# Altium PCB ART_2024-06-07.pcbdoc
Units mil, origin at the board's own origin, x right, y up, seen from the top; angles counter-clockwise.
Board outline 4947 x 4947 mil, 2 copper layers (Top Layer, Bottom Layer); 7 components, 0 nets, 0 pads, 0 vias.
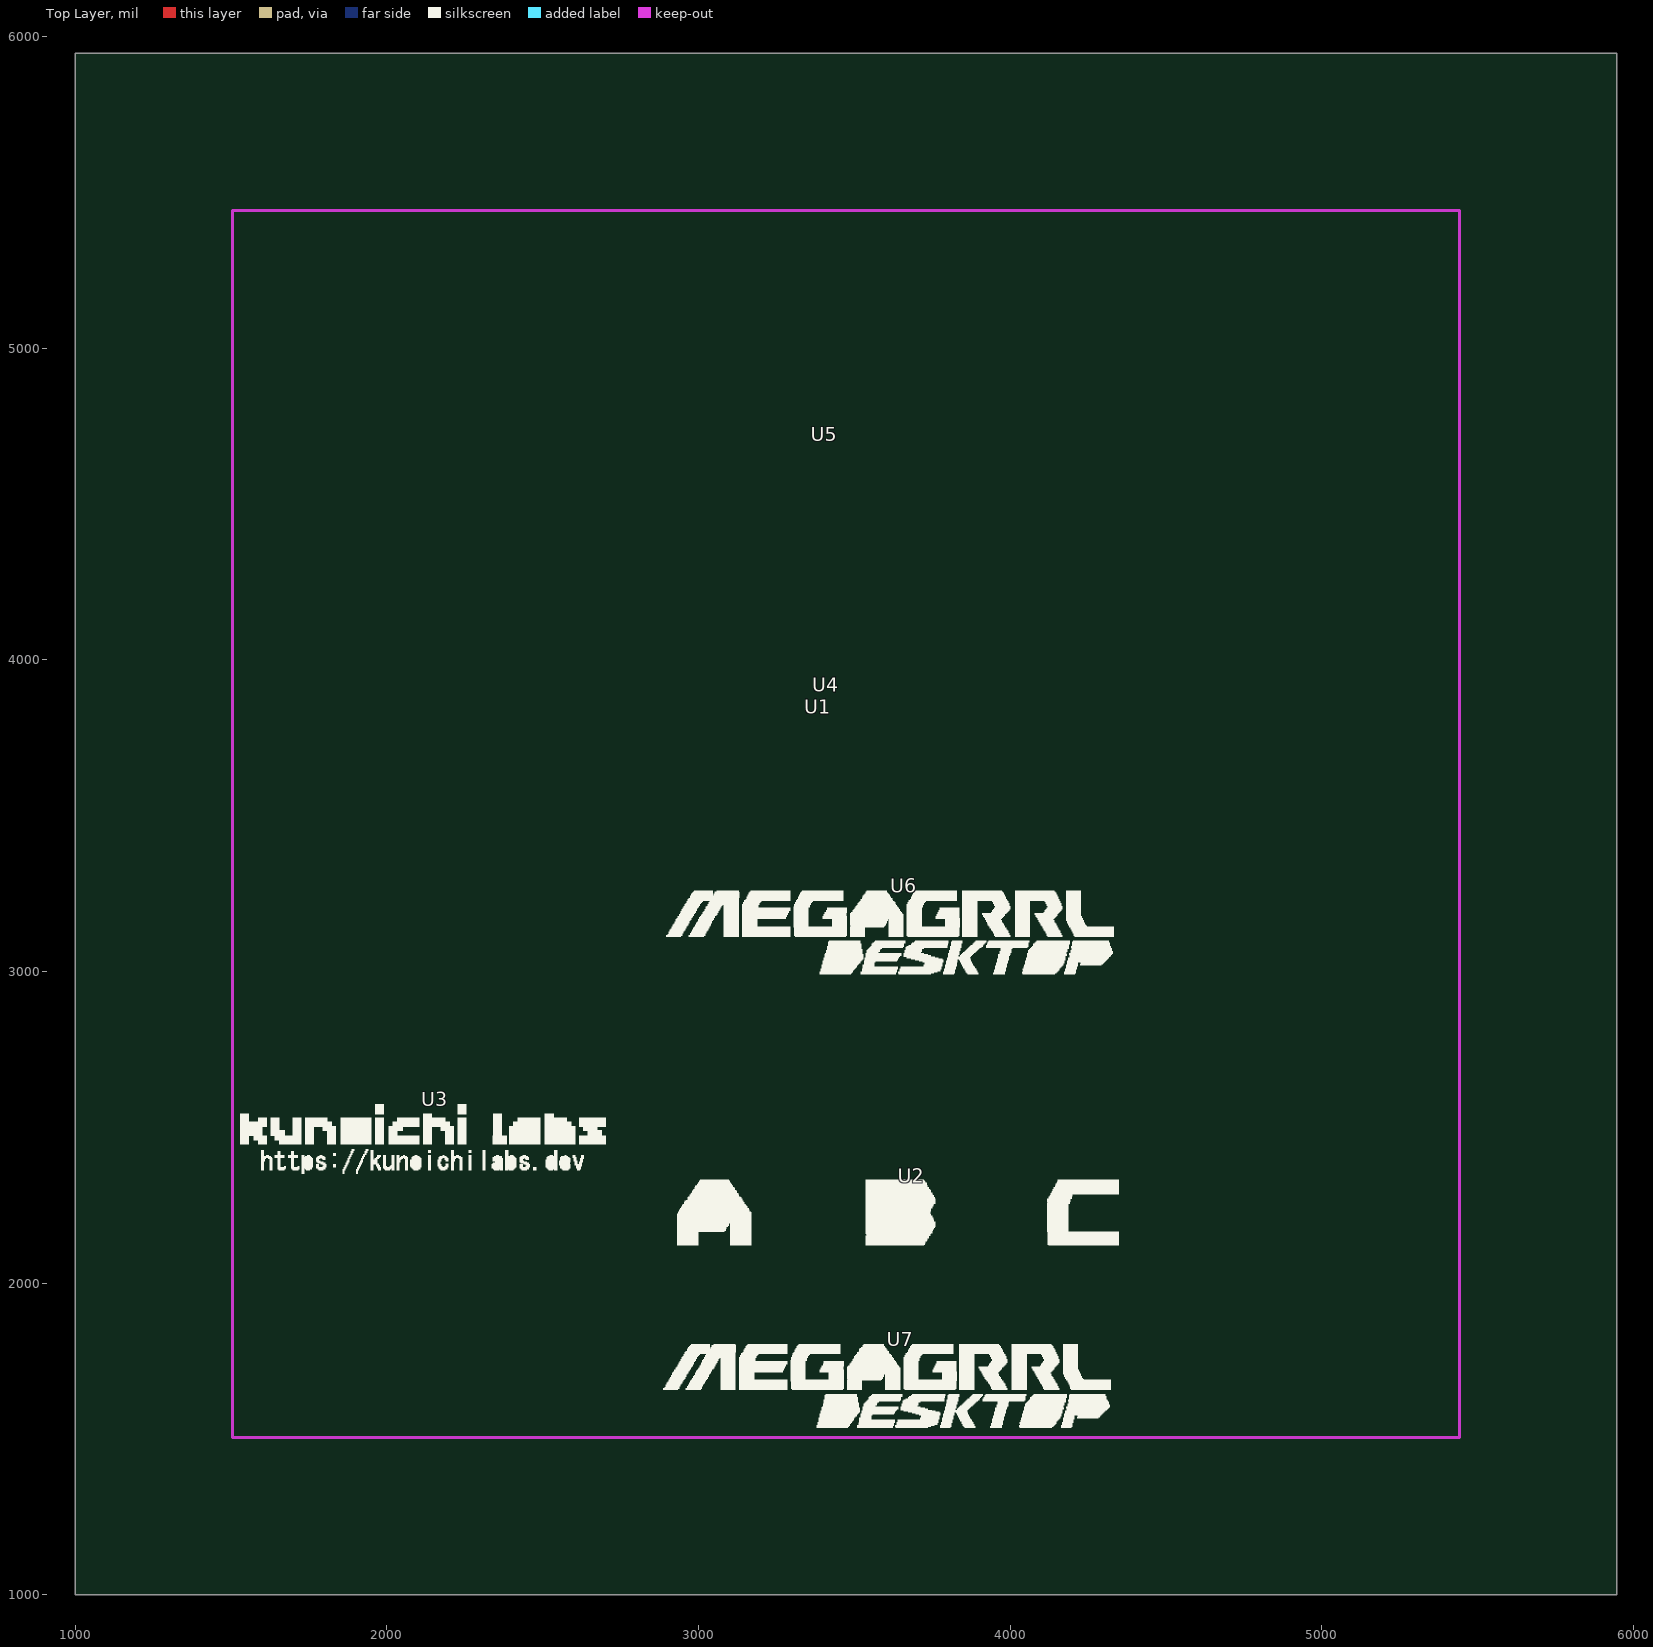
[diagram p0: Top Layer view]
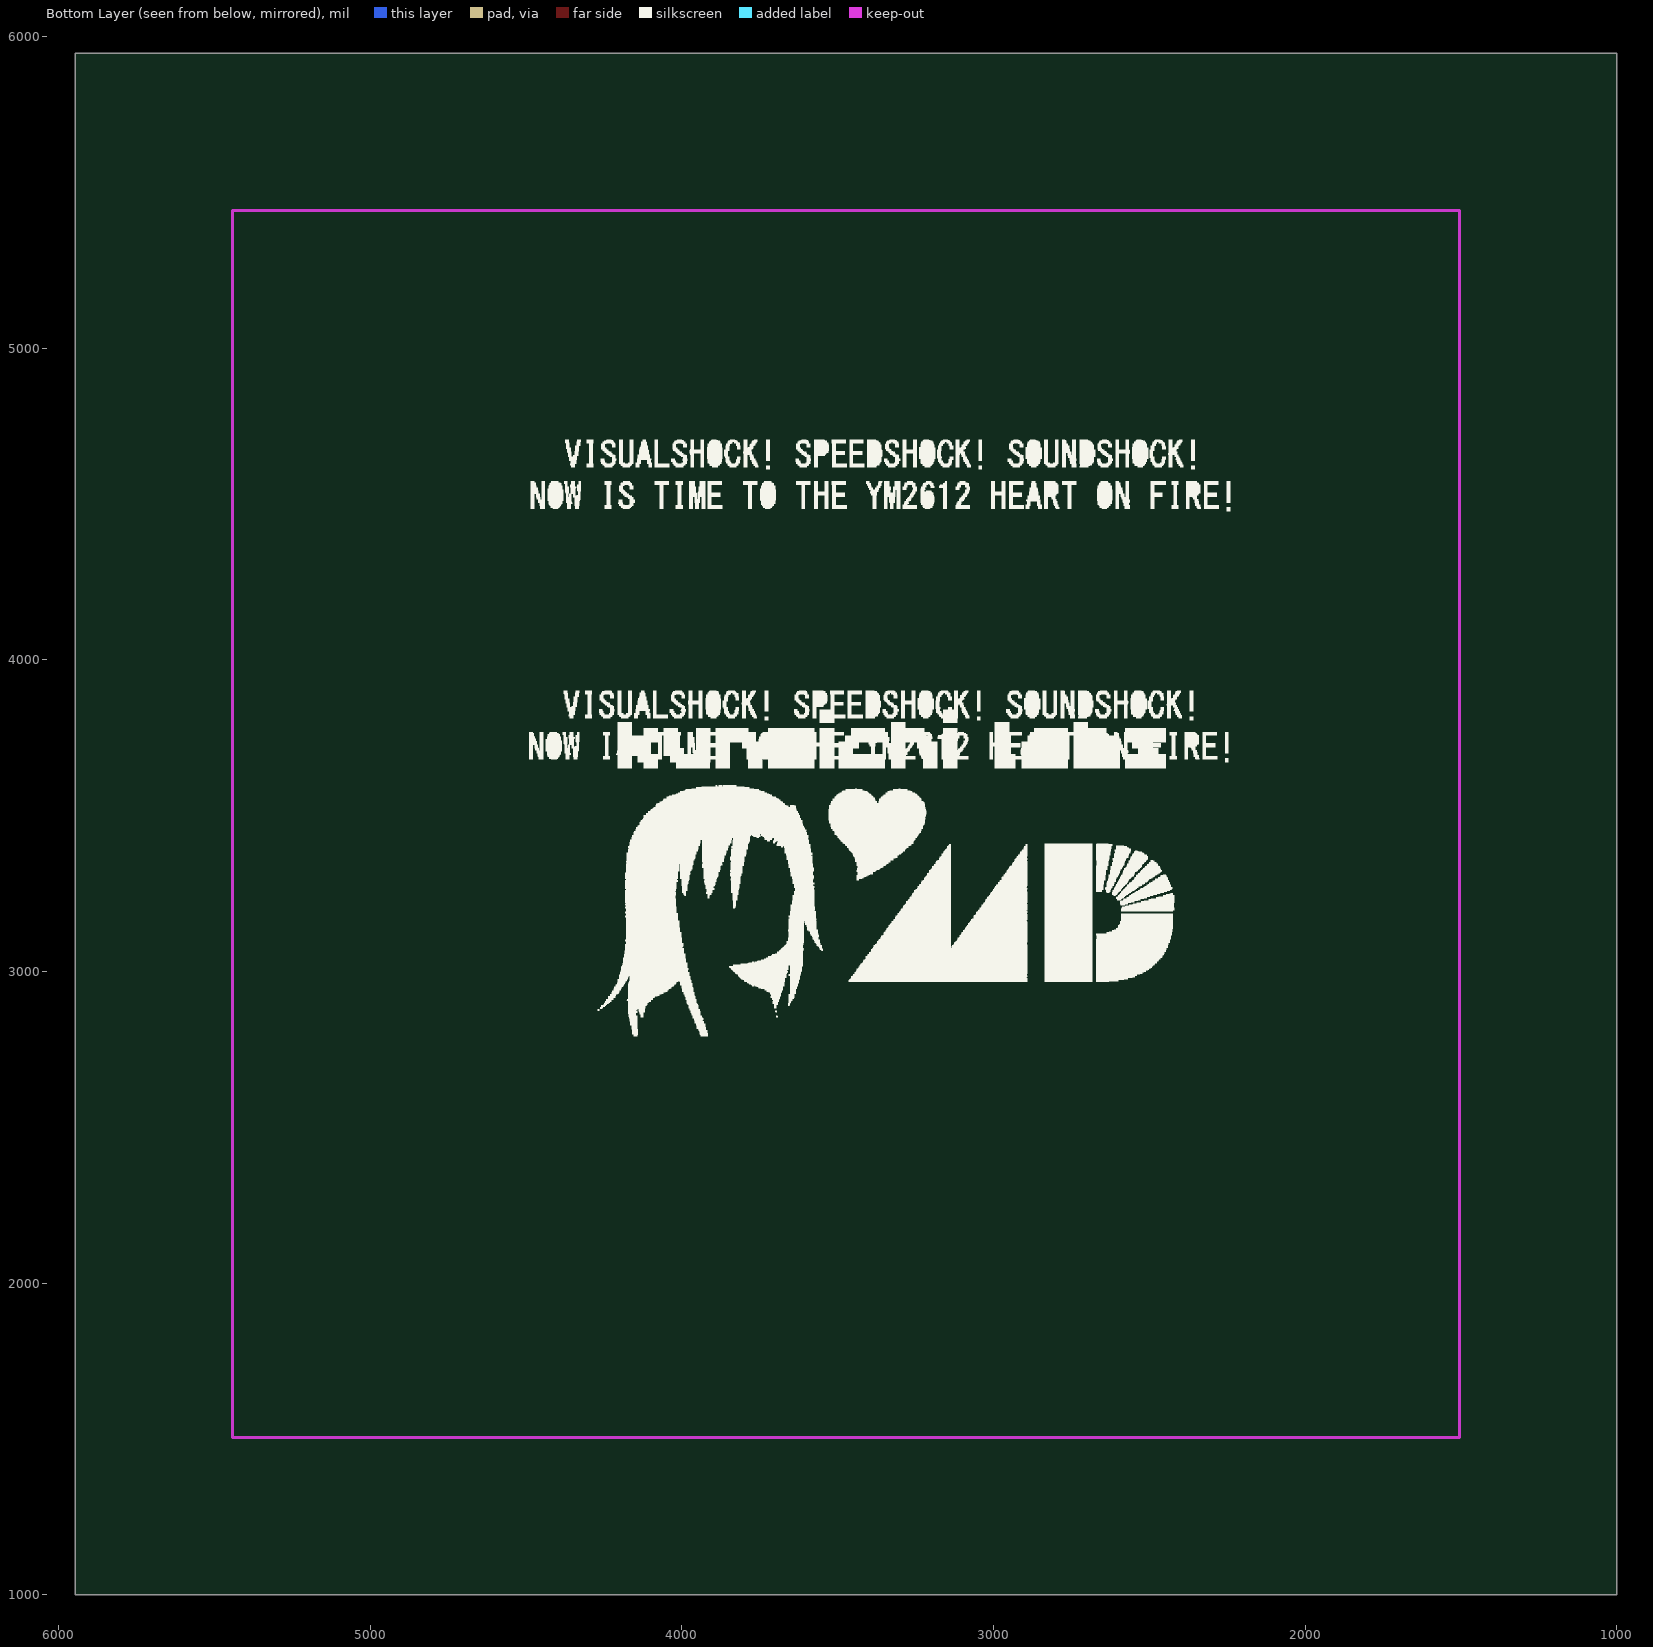
[diagram p1: Bottom Layer view, seen from below]

## Layer stack, top to bottom
Top Layer: signal copper (thickness not stored)
Dielectric: dielectric 12.6, FR-4, Dk 4.8
Bottom Layer: signal copper (thickness not stored)

## Board outline
5947,1000 1000,1000 1000,5947 5947,5947

## Components (designator, comment, footprint, x,y, rotation, side; value= is the part's Value field where it differs from the comment)
U1 "NATALIE-MD" NATALIE-MD 3200,3280 r0 top
U2 "NATALIE-ABC" NATALIE-ABC 3650,2205 r0 top
U3 "NATALIE-SITE" NATALIE-SITE 2180,2450 r0 top
U4 "NATALIE-HEART-FIRE" NATALIE-HEART-FIRE 3255,3780 r0 top
U5 "NATALIE-HEART-FIRE" NATALIE-HEART-FIRE 3250,4585 r0 top
U6 "NATALIE-MEGAGRRL-DESKTOP" NATALIE-MEGAGRRL-DESKTOP 3575,3155 r0 top
U7 "NATALIE-MEGAGRRL-DESKTOP" NATALIE-MEGAGRRL-DESKTOP 3565,1700 r0 top

## Footprints (in the part's own frame and the unit in brackets; to place one, negate y for a bottom-side part, rotate by r counter-clockwise, add the part's x,y. Pads: shape width x height; smd on the part's side, far side on the other; paste and mask are expansions set on the pad)
NATALIE-ABC [mil]
  silkscreen extent -719,-84 699,126
NATALIE-HEART-FIRE [mil]
NATALIE-MD [mil]
NATALIE-MEGAGRRL-DESKTOP [mil]
  silkscreen extent -679,-164 759,104
NATALIE-SITE [mil]
  silkscreen extent -650,-98 523,124

## Nets (pads, with @x,y where several pads share a name; then routed paths per layer and width w, separated by ;. In a path a pad name is that pad's centre, name@x,y a point inside that pad or via, vN(x,y) a via of type N, cw(c..) or ccw(c..) an arc to the next point about the centre after c; other vN are vias at no path point)

## Silkscreen, mask and mechanical layers (free items; w line width, h text height)
Document:
  lines w0.1: 3473.49,3473.49 3473.51,3473.51